# Altium PCB ST-LINK.PcbDoc
Units mil, origin at the board's own origin, x right, y up, seen from the top; angles counter-clockwise.
Board outline 2360 x 705 mil, 2 copper layers (Top Layer, Bottom Layer); 36 components, 29 nets, 149 pads, 80 vias.
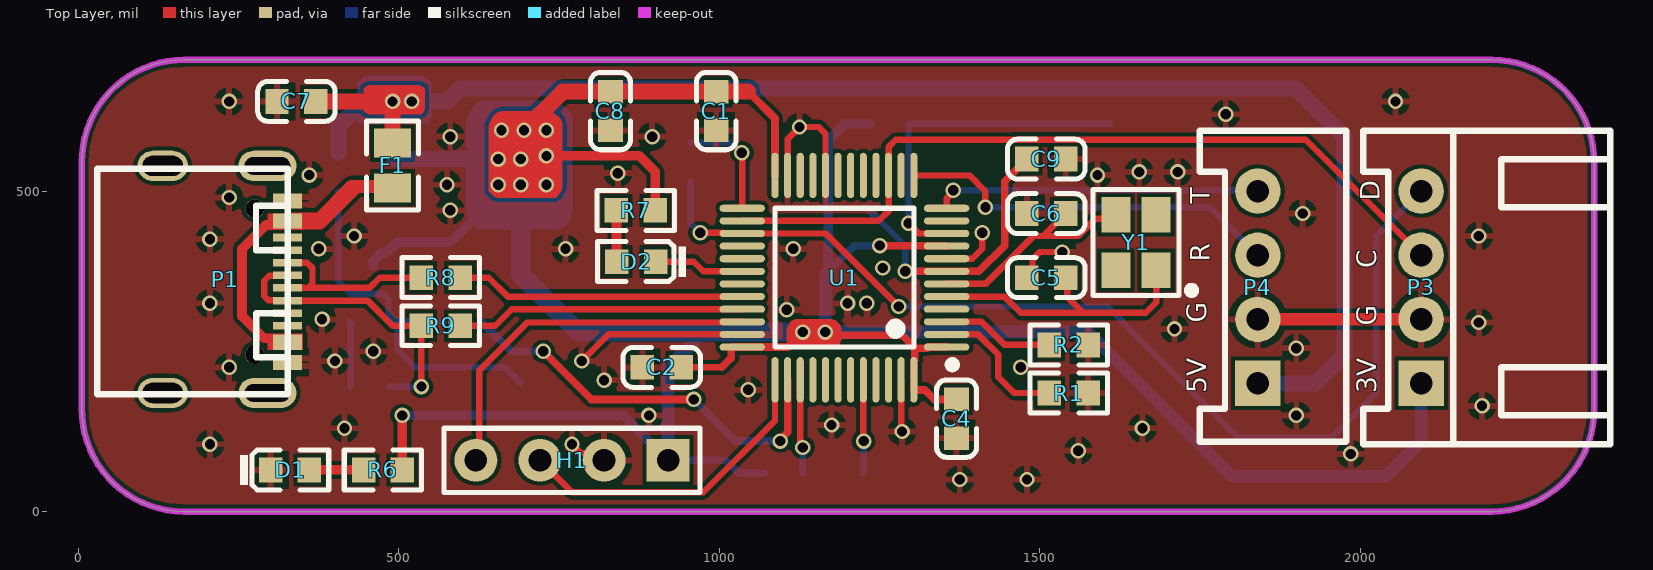
[diagram p0: Top Layer view]
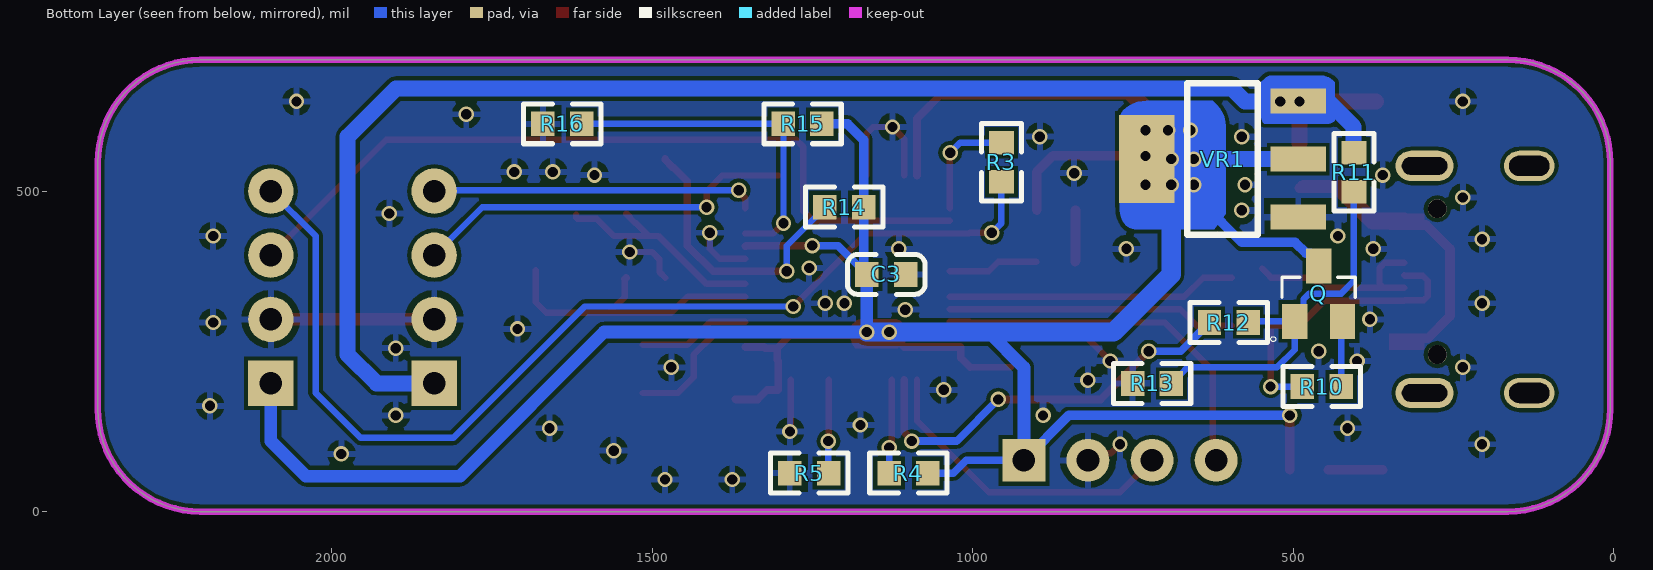
[diagram p1: Bottom Layer view, seen from below]

## Layer stack, top to bottom
Top Solder: solder mask 0.4, Solder Resist, Dk 3.5
Top Layer: signal copper 1.4
Dielectric 1: dielectric 12.6, FR-4, Dk 4.8
Bottom Layer: signal copper 1.4
Bottom Solder: solder mask 0.4, Solder Resist, Dk 3.5

## Board outline
5,160 5,545 cw(c165,545) 165,705 2205,705 cw(c2205,545) 2365,545 2365,160 cw(c2205,160) 2205,0 2195,0 165,0 cw(c165,160)

## Design rules (kind name [scope] priority, off if disabled: settings)
Clearance [All] p1: gap=6 ignorepadtopadclearanceinfootprint=TRUE
HoleSize [All] p1: absolutevalues=TRUE maxlimit=248.03 minlimit=7.87 maxpercent=80.000 minpercent=20.000
MinimumSolderMaskSliver [All] p1: minsoldermaskwidth=0
PolygonConnect [All] p1: connectstyle=Relief reliefconductorwidth=10 reliefentries=4 polygonreliefangle="90 Angle" airgapwidth=10
RoutingVias [All] p1: holewidth=16 width=28 viastyle="Through Hole" minholewidth=12 minwidth=24 maxholewidth=24 maxwidth=40
SilkToSolderMaskClearance [IsPad] p1: minsilkscreentomaskgap=0 clearancetoexposedcopper=TRUE
SolderMaskExpansion [All] p1: expansion=0 istentingtop=FALSE
UnRoutedNet [All] p1 off:
Width [All] p1: maxlimit=50 minlimit=8 preferedwidth=10
26 further rules are at their usual default settings.

## Components (designator, comment, footprint, x,y, rotation, side; value= is the part's Value field where it differs from the comment)
C1 "100nF" 0603_C 995,625 r90 top
C2 "100nF" 0603_C 910,225 r0 top
C3 "100nF" 0603_C 1134.68,370 r0 bottom
C4 "100nF" 0603_C 1370,145 r90 top
C5 "22pF" 0603_C 1510,365 r180 top
C6 "22pF" 0603_C 1510,465 r180 top
C7 "10uF" 0603_C 340,640 r180 top
C8 "10uF" 0603_C 830,625 r90 top
C9 "100nF" 0603_C 1510,550 r180 top
D1 "蓝灯" 0603_LED_S1 330,65 r0 top
D2 "黄灯" 0603_LED_S1 870,390 r180 top
F1 "自恢复保险/1A" 0805_R 490,540 r90 top
H1 "排针" HDR2.54-LI-4P 770,80 r180 top
P1 "TYPE_C" Type-C_16P 326.18,368.62 r0 top
P3 "XH2.54-4P卧式" XH2.54_4P卧式 2095,350 r90 top
P4 "XH2.54-4P立式" XH2.54_4P立式 1840,350 r90 top
Q "MMBT3904" SOT95P240X120-3N 460,340 r180 bottom
R1 "10KΩ" 0603_R 1545,185 r180 top
R2 "10KΩ" 0603_R 1545,260 r180 top
R3 "100Ω" 0603_R 955,545 r90 bottom
R4 "4.7KΩ" 0603_R 1100,60 r180 bottom
R5 "100KΩ" 0603_R 1255,60 r0 bottom
R6 "1KΩ" 0603_R 475,65 r180 top
R7 "1KΩ" 0603_R 869.69,470 r180 top
R8 "22Ω" 0603_R 565,365 r0 top
R9 "22Ω" 0603_R 565,290 r0 top
R10 "1.5KΩ" 0603_R 455,195 r0 bottom
R11 "10KΩ" 0603_R 405,529.68 r90 bottom
R12 "100Ω" 0603_R 600,295 r0 bottom
R13 "36KΩ" 0603_R 720,200 r180 bottom
R14 "10KΩ" 0603_R 1200,475 r180 bottom
R15 "10KΩ" 0603_R 1265.32,605 r180 bottom
R16 "10KΩ" 0603_R 1640,605 r180 bottom
U1 "STM32F103C8T6" STM32F103C8T6 1195,365 r90 top
VR1 "AMS1117-3.3" SOT-223 610,550 r180 bottom
Y1 "8MHZ  10PPM" SMD-3225_4P 1650,420 r90 top

## Footprints (in the part's own frame and the unit in brackets; to place one, negate y for a bottom-side part, rotate by r counter-clockwise, add the part's x,y. Pads: shape width x height; smd on the part's side, far side on the other; paste and mask are expansions set on the pad)
0603_C [mm]
  rect 0.93x0.98 smd: 1(-0.77,0) 2(0.77,0)
  silkscreen extent -1.53,-0.79 1.54,0.79, body extent -0.8,-0.4 0.8,0.4, height 0.3
0603_LED_S1 [mm]
  rect 0.93x0.98 smd: A(0.77,0) K(-0.77,0)
  silkscreen extent -1.97,-0.79 1.54,0.79, body extent -0.8,-0.4 0.8,0.4, height 0.6
0603_R [mm]
  rect 0.93x0.98 smd: 1(-0.77,0) 2(0.77,0)
  silkscreen extent -1.53,-0.79 1.54,0.79, body extent -0.85,-0.4 0.85,0.4, height 0.56
0805_R [mm]
  rect 1.16x1.47 smd: 1(-0.89,0) 2(0.89,0)
  silkscreen extent -1.77,-1.04 1.77,1.03, body extent -1,-0.62 1,0.63, height 0.49
HDR2.54-LI-4P [mm] "排针，4脚"
  rect 1.7x1.7 hole 0.9: 1(-3.81,0)
  round 1.7 hole 0.9: 2(-1.27,0) 3(1.27,0) 4(3.81,0)
  silkscreen extent -5.08,-1.27 5.08,1.27, body extent -5.08,-1.27 5.08,1.27, height 8.5
SMD-3225_4P [mm]
  rect 1.4x1.15 smd: 1(-1.1,-0.8) 2(1.1,-0.8) 3(1.1,0.8) 4(-1.1,0.8)
  silkscreen extent -2.1,-2.35 2.1,1.7, body extent -1.6,-1.25 1.6,1.25, height 0.61
SOT95P240X120-3N [mm]
  rect 1x1.4 smd: 1(-0.95,-1.1) 2(0.95,-1.1) 3(0,1.1)
  silkscreen extent -1.9,-1.9 1.45,0.65, body extent -1.45,-1.19 1.45,1.18, height 1.3
SOT-223 [mm]
  rect 2.2x1 smd: 1(3,-2.3) 2(3,0) 3(3,2.3)
  rect 2.2x3.5 smd: 2(-3,0)
  silkscreen extent -1.4,-3 1.4,3, body extent -3.49,-3.24 3.49,3.24, height 1.64
STM32F103C8T6 [mm]
  oval 0.28x1.8 smd mask+0.051: 1(-2.75,-4.05) 2(-2.25,-4.05) 3(-1.75,-4.05) 4(-1.25,-4.05) 5(-0.75,-4.05) 6(-0.25,-4.05) 7(0.25,-4.05) 8(0.75,-4.05) 9(1.25,-4.05) 10(1.75,-4.05) 11(2.25,-4.05) 12(2.75,-4.05) 25(2.75,4.05) 26(2.25,4.05) 27(1.75,4.05) 28(1.25,4.05) 29(0.75,4.05) 30(0.25,4.05) 31(-0.25,4.05) 32(-0.75,4.05) 33(-1.25,4.05) 34(-1.75,4.05) 35(-2.25,4.05) 36(-2.75,4.05)
  oval 1.8x0.28 smd mask+0.051: 13(4.05,-2.75) 14(4.05,-2.25) 15(4.05,-1.75) 16(4.05,-1.25) 17(4.05,-0.75) 18(4.05,-0.25) 19(4.05,0.25) 20(4.05,0.75) 21(4.05,1.25) 22(4.05,1.75) 23(4.05,2.25) 24(4.05,2.75) 37(-4.05,2.75) 38(-4.05,2.25) 39(-4.05,1.75) 40(-4.05,1.25) 41(-4.05,0.75) 42(-4.05,0.25) 43(-4.05,-0.25) 44(-4.05,-0.75) 45(-4.05,-1.25) 46(-4.05,-1.75) 47(-4.05,-2.25) 48(-4.05,-2.75)
  silkscreen extent -3.6,-4.43 2.75,2.75, body extent -4.5,-4.5 4.5,4.5, height 1.6
Type-C_16P [mm]
  oval 2x1.2 hole 0.8 slot 1.6 at 0 deg: 0(-4.95,-4.662) 0(-4.95,4.338)
  oval 2.3x1.2 hole 0.7 slot 1.8 at 0 deg: 0(-0.8,-4.662) 0(-0.8,4.338)
  rect 1.15x0.3 smd: A1(-0.002,3.1) A4(-0.004,2.3) A5(0,1) A6(0,0) A7(-0.002,-0.5) A8(0,1.5) A9(0,-2.8) A12(0,-3.6) B1(0,-3.3) B4(0,-2.5) B5(0,-2) B6(0,-1) B7(-0.002,0.5) B8(0,-1.5) B9(-0.004,2) B12(-0.002,2.8)
  round 0.75 hole 0.75 unplated: ""(-1.3,-3.14) ""(-1.3,2.64)
  silkscreen extent -7.55,-4.72 0,4.22, body extent -8.02,-6.15 1.08,5.65, height 3.4
XH2.54_4P卧式 [mm]
  rect 1.8x1.8 hole 0.9: 1(-3.81,0)
  round 1.8 hole 0.9: 2(-1.27,0) 3(1.27,0) 4(3.81,0)
  silkscreen extent -6.22,-7.49 6.2,2.3, body extent -6.29,-7.31 6.21,0.33, height 5.95
XH2.54_4P立式 [mm]
  rect 1.8x1.8 hole 0.9: 1(-3.81,0)
  round 1.8 hole 0.9: 2(-1.27,0) 3(1.27,0) 4(3.81,0)
  silkscreen extent -6.12,-3.5 6.2,2.3, body extent -6.22,-3.44 6.28,2.36, height 7.2

## Part data
C1 C2 C3 C4 C9: library part "0603 100nF (104) 10% 50V", "贴片电容", Package=0603, SuppliersPartNumber=C14663, ComponentLink1Description=供应商链接, ComponentLink1URL=http://www.szlcsc.com/product/details_15331.html, Supplier=LC
C5 C6: library part "0603 22pF (220) 5% 50V", "贴片电容", Package=0603, SuppliersPartNumber=C1653, ComponentLink1Description=供应商链接, ComponentLink1URL=http://www.szlcsc.com/product/details_2005.html, Supplier=LC
C7 C8: library part "0603 10uF (106) 10% 10V", "贴片电容", Package=0603, SuppliersPartNumber=C19702, ComponentLink1Description=供应商链接, ComponentLink1URL=http://www.szlcsc.com/product/details_20411.html, Supplier=LC
D1: library part "0603 蓝灯", "发光二极管", Package=0603, SuppliersPartNumber=C72041, ComponentLink1Description=供应商链接, ComponentLink1URL=http://www.szlcsc.com/product/details_73150.html, Supplier=LC
D2: library part "0603 黄灯", "发光二极管", Package=0603, SuppliersPartNumber=C72038, ComponentLink1Description=供应商链接, ComponentLink1URL=http://www.szlcsc.com/product/details_73147.html, Supplier=LC
F1: library part 保险丝0805（自恢复）, "保险丝"
H1: library part 排针HDR2.54-LI-4P
P1: library part "Tpye C 16线母座", "USB接口"
P3 P4: "XH2.54-2P接口"
Q: "三极管NPN(BJT)", Package="SOT-23-3 Taiwan Semiconductor", Availability=Unavailable, MF=STMicroelectronics, MP=MMBT3904, Price=None, SnapEDA_Link=https://www.snapeda.com/parts/MMBT3904/STMicroelectronics/view-part/2875870/?ref=snap
R1 R2 R11 R14 R15 R16: library part "0603 10KΩ (1002) 1%", "贴片电阻", Package=0603, SuppliersPartNumber=C25804, ComponentLink1Description=供应商链接, ComponentLink1URL=http://www.szlcsc.com/product/details_26547.html, Supplier=LC
R3 R12: library part "0603 100Ω (1000) 1%", "贴片电阻", Package=0603, SuppliersPartNumber=C22775, ComponentLink1Description=供应商链接, ComponentLink1URL=http://www.szlcsc.com/product/details_23502.html, Supplier=LC
R4: library part "0603 4.7KΩ (4701) 1%", "贴片电阻", Package=0603, SuppliersPartNumber=C23162, ComponentLink1Description=供应商链接, ComponentLink1URL=http://www.szlcsc.com/product/details_23889.html, Supplier=LC
R5: library part "0603 100KΩ (1003) 1%", "贴片电阻", Package=0603, SuppliersPartNumber=C25803, ComponentLink1Description=供应商链接, ComponentLink1URL=http://www.szlcsc.com/product/details_26546.html, Supplier=LC
R6 R7: library part "0603 1KΩ (1001) 1%", "贴片电阻", Package=0603, SuppliersPartNumber=C21190, ComponentLink1Description=供应商链接, ComponentLink1URL=http://www.szlcsc.com/product/details_21904.html, Supplier=LC
R8 R9: library part "0603 22Ω (22R0) 1%", "贴片电阻", Package=0603, SuppliersPartNumber=C23345, ComponentLink1Description=供应商链接, ComponentLink1URL=http://www.szlcsc.com/product/details_24078.html, Supplier=LC
R10: library part "0603 1.5KΩ (1501) 1%", "贴片电阻", Package=0603, SuppliersPartNumber=C22843, ComponentLink1Description=供应商链接, ComponentLink1URL=http://www.szlcsc.com/product/details_23570.html, Supplier=LC
R13: library part "0603 36KΩ (3602) 1%", "贴片电阻", Package=0603, SuppliersPartNumber=C23147, ComponentLink1Description=供应商链接, ComponentLink1URL=http://www.szlcsc.com/product/details_23874.html, Supplier=LC
U1: "STM32芯片"
VR1: library part "SOT-223 AMS1117-3.3", "低压差线性稳压(LDO)", Package=SOT-223, SuppliersPartNumber=C6186, ComponentLink1Description=供应商链接, ComponentLink1URL=http://www.szlcsc.com/product/details_6652.html, Supplier=LC
Y1: library part "SMD-3225_4P  16MHZ 9PF 10PPM", "贴片晶振", Package=SMD-3225_4P, SuppliersPartNumber=C13738, ComponentLink1Description=供应商链接, ComponentLink1URL=http://www.szlcsc.com/product/details_14393.html, Supplier=LC

## Via types
v1: diameter 24, hole 16, Top Layer to Bottom Layer, tented both sides, 80 vias

## Nets (pads, with @x,y where several pads share a name; then routed paths per layer and width w, separated by ;. In a path a pad name is that pad's centre, name@x,y a point inside that pad or via, vN(x,y) a via of type N, cw(c..) or ccw(c..) an arc to the next point about the centre after c; other vN are vias at no path point)
AIN: R15.1 R16.2 U1.10 | length 535.4
  Top Layer w10: v1(1295,450) 1311.1,433.9 U1.10
  Bottom Layer w10: v1(1295,450) 1295,604.37 R15.1 R16.2
DC_3.3V: C1.2 C2.2 C3.2 C4.2 C8.2 H1.1 P3.1 Q.3 R4.2 R6.1 R7.1 R14.2 R15.2 U1.1 U1.9 U1.24 U1.36 U1.48 VR1.2 | length 5112.9
  Top Layer w10: C2.2 1003.82,225
  Top Layer w12: 1003.82,225 1018.58,239.76 1018.58,256.24 1019.07,256.73 U1.36 1106.73,256.73 v1(1130,280) ; 1044.68,655.32 1086.73,613.27 U1.24 ; 1180,275 1285,275 1305,255 ; v1(1250,415) 1323.74,415 1324.04,414.7 1353.96,414.7 U1.9 ; U1.1 1325.5,256.73 1323.77,255 1305,255 ; C4.2 1369.68,175 1335,175 1320.24,189.76 1303.76,189.76 1303.27,190.25 U1.48 1303.27,234.5 1305,236.23 1305,255
  Top Layer w15: v1(505,150) 505,149.73 505.31,149.41 R6.1 ; v1(730,555) 875,555 900,530 R7.1
  Top Layer w25: v1(690,550) 690,590 v1(695,595) 755.32,655.32 C8.2 C1.2 1044.68,655.32
  Top Layer w30: P3.1@2087.5,181.89 cw(c2113.11,181.89) P3.1
  Bottom Layer w12: H1.1 1010,80 1030,60 R4.2 ; C3.2@1169.68,374.68 1210,415 v1(1250,415)
  Bottom Layer w15: Q.3 460,391.18 472.19,403.37 480.06,403.37 496.69,420 580,420 640,480 ; v1(505,150) 850,150 H1.1 ; C3.2 1169.68,374.68 R14.2 1170,475.32 1170,580 1195,605 R15.2
  Bottom Layer w20: H1.1 920,225 975,280 ; C3.2 v1(1165,280) 1575,280 1800,55 2040,55 2095,110 P3.1
  Bottom Layer w25: VR1.2@491.89,550 v1(655,550) v1(690,550) VR1.2@728.11,550
  Bottom Layer w30: v1(690,510) 690,370 780,280 975,280 v1(1130,280) v1(1165,280)
  other v1: 655,510 730,510 660,595 730,595
DC_5V: C7.1 F1.2 P4.1 R11.2 VR1.3 | length 2270.3
  Top Layer w25: C7.1 v1(490,640) ; F1.2 490,635.99 cw(c496.45,635.99) v1@491.89,640.55
  Bottom Layer w25: R11.2 405.32,560.32 405.32,600.32 445,640 ; v1(520,640) 575,640 595,660 1900,660 1975,585 1975,245 1930,200 P4.1
GND: C1.1 C2.1 C3.1 C4.1 C5.2 C6.2 C7.2 C8.1 C9.1 D1.K H1.2 P1.A1 P1.A12 P1.B1 P1.B12 P3.2 P4.2 R1.1 R2.1 R5.2 R13.1 R16.1 U1.8 U1.20 U1.23 U1.35 U1.47 VR1.1 | length 1027.7
  Top Layer w10: v1(770,105) 784.11,90.89 809.11,90.89 H1.2 ; v1(785,235) 826.42,276.42 U1.35 ; U1.23 1106.42,581.42 v1(1125,600) 1155,600 1165.47,589.53 U1.20 ; U1.47 1283.58,126.42 v1(1285,125) ; U1.8 1394.53,394.53 1410,410 v1(1410,435) ; C5.2 1488.43,373.75 1488.43,393.43 1500,405 v1(1535,405)
  Top Layer w20: P4.2 P3.2
  other v1: 1375,50 1480,50 1985,90 1560,95 205,105 415,130 1660,130 1175,135 890,150 1900,150 2190,165 1045,190 820,205 235,225 1470,225 400,235 460,250 1900,255 1710,285 2185,295 380,300 1105,315 205,325 1200,325 1230,325 1255,380 375,410 760,410 1115,410 205,425 430,430 2185,430 1910,465 580,470 235,490 575,510 360,525 1590,525 841.46,528.08 1655,530 1715,530 580,585 895,585 1790,620 235,640 2055,640
LED: D2.K U1.30 | length 141.5
  Top Layer w10: D2.K 960,390 975,375 1035.39,375 U1.30
NetD1_A: D1.A R6.2 | length 84.4
  Top Layer w15: D1.A R6.2
NetD2_A: D2.A R7.2 | length 80.1
  Top Layer w15: R7.2 839.37,390.31 D2.A
NetQ_1: Q.1 R11.1 R12.1 R13.2 | length 602
  Bottom Layer w10: R11.1 405,360 425,340 475,340 483.63,331.37 483.63,310.47 Q.1 ; R12.1 567.99,296.69 Q.1 ; R13.2 689.68,200.98 676.38,214.29 675.39,214.29 664.68,225 525,225 497.4,252.6 Q.1
NetQ_2: Q.2 R10.1 | length 102.6
  Bottom Layer w10: Q.2 424.69,294.61 R10.1
NetR1_2: R1.2 U1.2 | length 218.6
  Top Layer w10: U1.2 1403.58,276.42 1435,245 1435,210 1460,185 R1.2
NetR2_2: R2.2 U1.3 | length 175.2
  Top Layer w10: U1.3 1408.9,296.1 1445,260 R2.2
NetR3_2: R3.2 U1.25 | length 173.3
  Top Layer w10: v1(1035,560) 1035.55,559.45 U1.25
  Bottom Layer w10: R3.2 1019.68,575.32 v1(1035,560)
NetR4_1: R4.1 U1.39 | length 148.2
  Top Layer w10: U1.39 1126.1,105.52 1130,101.62 v1(1130,100)
  Bottom Layer w10: R4.1@1129.68,60.63 R4.1 1130.31,99.69 v1(1130,100)
NetR5_1: R5.1 U1.44 | length 145.9
  Top Layer w10: U1.44 1224.53,110.47 v1(1225,110)
  Bottom Layer w10: R5.1 1225,60.31 v1(1225,110)
OSC_IN: C5.1 U1.5 Y1.1 | length 460.9
  Top Layer w10: U1.5 1444.53,335.47 1470,310 1567.5,310 ; C5.1@1542.76,362.55 1542.76,334.74 1567.5,310 ; Y1.1 1681.5,326.5 1665,310 1567.5,310
  Top Layer w12: C5.1 C5.1@1542.76,362.55
OSC_OUT: C6.1 U1.6 Y1.3 | length 370.6
  Top Layer w10: U1.6 1415.16,355.16 1490,430 1505.32,430 ; C6.1@1534.07,458.75 C6.1 1540.32,464.02 1527.01,450.71 1526.02,450.71 1505.32,430 ; Y1.3 1618.5,458.39 1616.84,456.72 1586.72,456.72 1560,430 1505.32,430
RESET: C9.2 R14.1 U1.7 | length 446.8
  Top Layer w12: v1(1290,375) 1290.16,374.84 U1.7 1404.84,374.84 1445,415 1445,515.32 1466.39,536.71 1467.38,536.71 1479.68,549.02 C9.2
  Bottom Layer w10: R14.1@1243.29,461.71 1290,415 v1(1290,375)
  Bottom Layer w12: R14.1 1230.31,474.02 1242.62,461.71 R14.1@1243.29,461.71
STLK_RX: P4.3 U1.13 | length 602.9
  Top Layer w10: U1.13 1390.55,524.45 1415,500 v1(1415,475)
  Bottom Layer w10: v1(1415,475) 1765,475 P4.3
STLK_TX: P4.4 U1.12 | length 508.2
  Top Layer w10: U1.12 1354.45,488.59 1365,499.14 v1(1365,501.45)
  Bottom Layer w10: v1(1365,501.45) 1838.55,501.45 P4.4
SWCLK: H1.3 U1.37 | length 497.5
  Top Layer w10: H1.3 770,30 975,30 1086.73,141.73 U1.37
SWDIO: H1.4 U1.34 | length 584.1
  Top Layer w10: H1.4 625,85 625,220 700,295 1004.25,295 1005.35,296.1 U1.34
T_JTCK: P3.3 U1.15 U1.26 | length 1245.4
  Top Layer w10: U1.26 1248.58,453.58 1263.9,468.9 U1.15 1263.9,568.9 1275,580 1456.53,580 1456.82,580.29 1563.18,580.29 1563.47,580 1914.42,580 1914.71,580.29 P3.3
T_JTMS: P3.4 R3.1 U1.27 | length 1646.4
  Top Layer w10: v1(970,435) 1004.25,435 1005.35,433.9 U1.27 1166.1,433.9 v1(1280,320)
  Bottom Layer w10: R3.1 955,450 v1(970,435) ; v1(1280,320) 1605,320 1810,115 1955,115 2025,185 2025,430 P3.4
USB_DM: P1.A7 P1.B7 R8.1 | length 310.9
  Top Layer w10: P1.A7 358.94,348.94 ; P1.B7 356.69,388.31 365,380 365,355 358.94,348.94 ; R8.1@547.99,379.29 534.69,365.98 R8.1 470,365 453.94,348.94 358.94,348.94
USB_DP: P1.A6 P1.B6 R9.1 R10.2 | length 472.4
  Top Layer w10: P1.A6 325.27,367.71 297.71,367.71 290,360 290,335.86 295.86,330 325.43,330 P1.B6 450.75,329.25 490,290 R9.1 534.69,195.31 v1(535,195)
  Bottom Layer w10: R10.2 v1(535,195)
USB_M: R8.2 U1.32 | length 452.5
  Top Layer w10: R8.2 640,365 669.53,335.47 U1.32
USB_P: R9.2 U1.33 | length 450.9
  Top Layer w10: R9.2 650,290 675.79,315.79 U1.33
USB_RENU: R12.2 U1.38 | length 642.2
  Top Layer w12: v1(725,250) 800,175 v1(960,175) ; v1(1095,110) 1095,112.11 1106.42,123.53 U1.38
  Bottom Layer w12: R12.2 630.32,294.02 642.62,281.71 643.61,281.71 675.32,250 v1(725,250) ; v1(960,175) 1025,110 v1(1095,110)
VBUS: F1.1 P1.A4 P1.A9 P1.B4 P1.B9 | length 652.1
  Top Layer w15: P1.A4 374.17,459.17 425,510 484.96,510 F1.1 434.96,504.96 377.36,447.36 P1.B9 292.36,447.36 255,410 255,305 289.8,270.2 P1.B4
pads on no net: P1. P1.0 P1.A5 P1.A8 P1.B5 P1.B8 U1.4 U1.11 U1.14 U1.16 U1.17 U1.18 U1.19 U1.21 U1.22 U1.28 U1.29 U1.31 U1.40 U1.41 U1.42 U1.43 U1.45 U1.46 Y1.2 Y1.4

## Polygon pours and split planes (outlines as drawn)
GND on Top Layer "GND_L01_P039" (solid, remove dead copper, pour order 39): -45,760 -35,750 -35,-110 2430,-110 2450,-90 2420,-60 2420,770
no net on Top Layer "NONET_L01_P000" (solid, remove dead copper, pour order 0): 325,550
GND on Bottom Layer "GND_L02_P038" (solid, remove dead copper, pour order 38): -60,805 -60,-170 -50,-160 2620,-160 2620,660 2520,760
no net on Bottom Layer "NONET_L02_P004" (solid, remove dead copper, pour order 4): 505,500

## Keep-outs
Keep-Out Layer:
  lines w10: 5,160 ccw(c165,160) 165,0 2205,0 ccw(c2205,160) 2365,160 2365,545 ccw(c2205,545) 2205,705 165,705 ccw(c165,545) 5,545 5,160

## Other copper
Top Layer:
  region net DC_3.3V: 1105,285.9 1109.49,293.86 cw(c1120,287.93) 1120,300 1172.93,300 cw(c1172.93,282.94) 1185,295 cw(c1172.94,282.93) 1190,282.93 1190,272.07 cw(c1165.87,272.07) 1182.93,255 1117.07,255 cw(c1123.11,274.57) 1105,265
  region net DC_3.3V: 640,595.86 cw(c674.14,595.86) 650,620 cw(c662.07,607.93) 662.07,625 725.86,625 cw(c725.86,590.86) 750,615 cw(c737.93,602.93) 755,602.93 755,510 cw(c730.86,510) 747.93,492.93 745,490 655,490 cw(c655,502.07) 646.46,493.54 640,500
  region net DC_5V: 445,660 446.46,661.46 cw(c455,652.93) 455,665 530,665 cw(c530,652.93) 538.54,661.46 540,660 540,630 cw(c527.93,630) 536.46,621.46 535,620 455,620 cw(c455,632.07) 446.46,623.54 445,625
  region net VBUS: 295,277.5 295,252.5 350,252.5 350,277.5
  region net VBUS: 295,465 295,440 350,440 350,465
Bottom Layer:
  region net DC_3.3V: 605,464.89 605,600.86 cw(c653.28,600.86) 619.14,635 625,640.86 728.79,640.86 cw(c728.79,589.65) 765,625.86 cw(c752.93,613.79) 770,613.79 770,470 cw(c735.86,470) 760,445.86 cw(c747.93,457.93) 747.93,440.86 622.77,440.86
  region net DC_5V: 435,670 437.93,672.93 cw(c455,655.86) 455,680 535,680 cw(c535,667.93) 543.54,676.46 550,670 550,617.07 cw(c532.93,617.07) 545,605 445,605 cw(c445,617.07) 436.46,608.54 435,610
  region net DC_3.3V: 725,435
  region net DC_5V: 435,655
  region net DC_5V: 435,670
  region net DC_5V: 435,670

## Silkscreen, mask and mechanical layers (free items; w line width, h text height)
Top Overlay:
  text "D" at 2030,485 h30 r90
  text "T" at 1765,480 h30 r90
  text "R" at 1765,390 h30 r90
  text "C" at 2025,380 h30 r90
  text "G" at 1760,295 h30 r90
  text "G" at 2025,290 h30 r90
  text "5V" at 1760,185 h30 r90
  text "3V" at 2025,185 h30 r90
Mechanical 1:
  lines w30: 2195,0 165,0 cw(c165,160) 5,160 5,545 cw(c165,545) 165,705 2205,705 cw(c2205,545) 2365,545 2365,160 cw(c2205,160) 2205,0